# Altium PCB LiPo_4S_balancer.PcbDoc
Units mm, origin at the board's own origin, x right, y up, seen from the top; angles counter-clockwise.
Board outline 99.06 x 50.8 mm, 2 copper layers (Top Layer, Bottom Layer); 41 components, 37 nets, 115 pads, 20 vias.
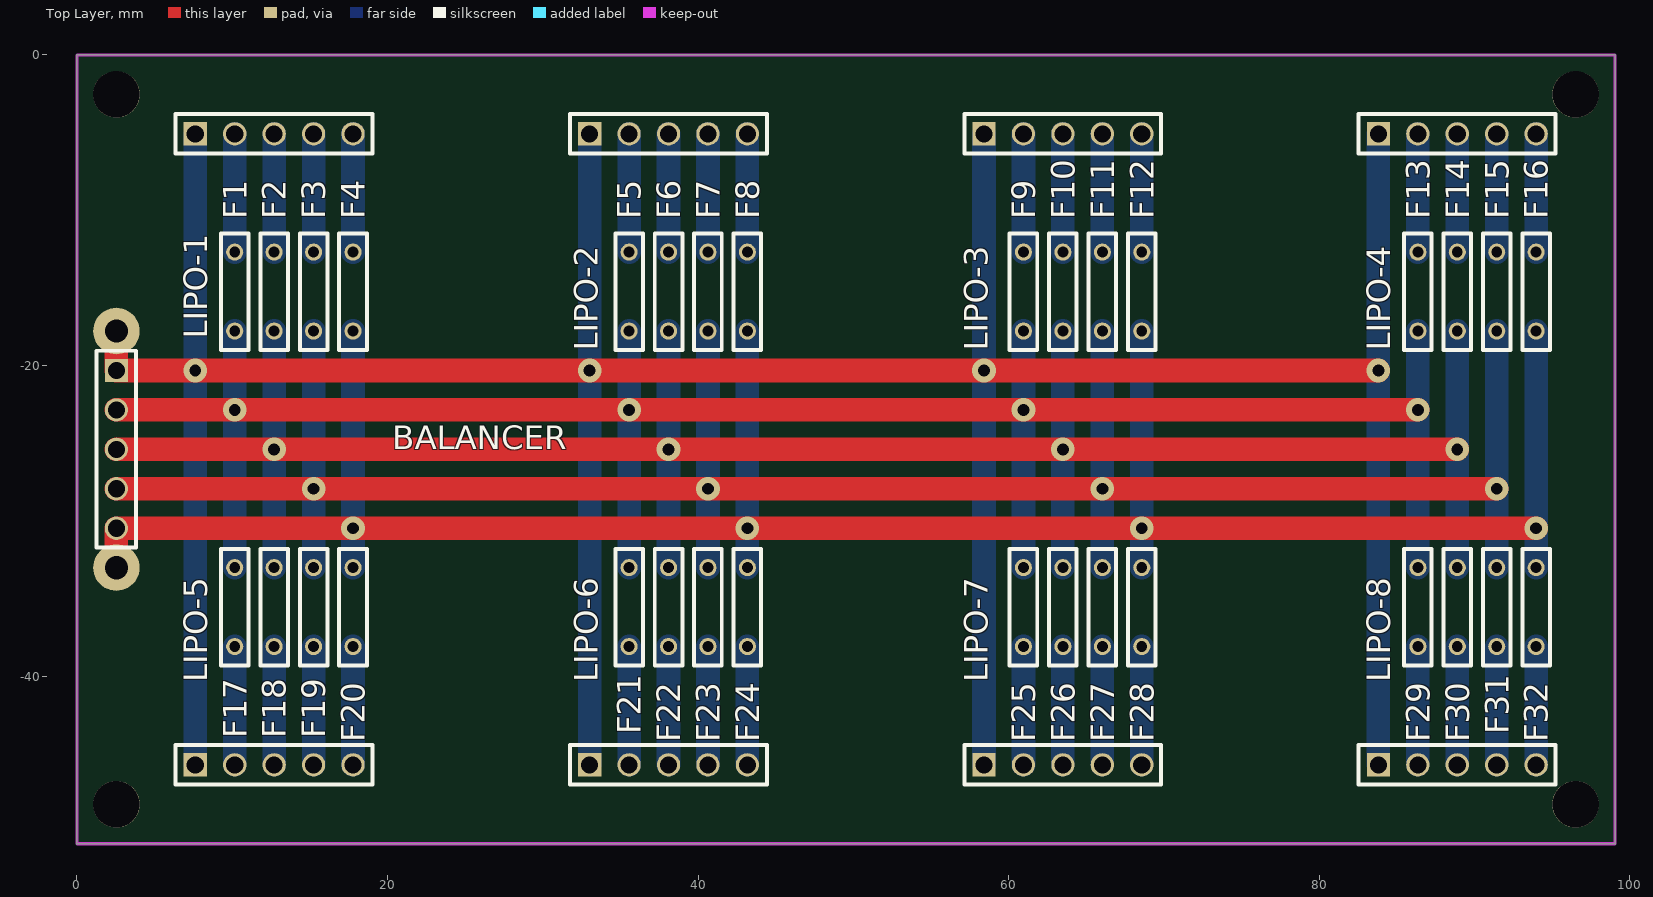
[diagram p0: Top Layer view]
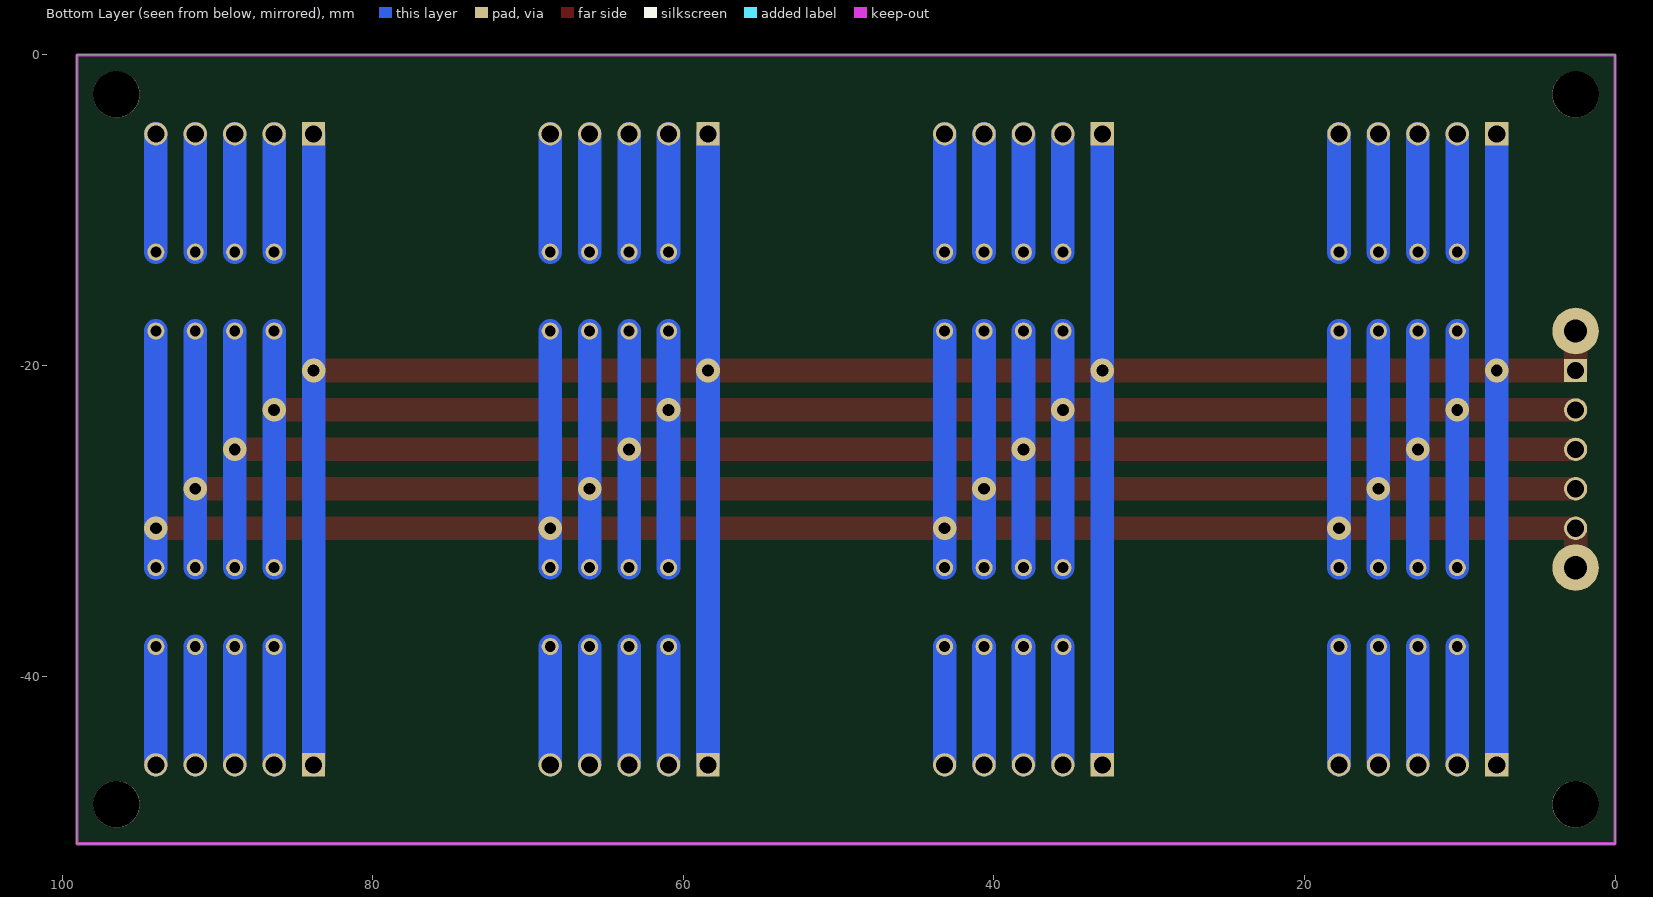
[diagram p1: Bottom Layer view, seen from below]

## Layer stack, top to bottom
Top Solder: solder mask 0.0102, Solder Resist, Dk 3.5
Top Layer: signal copper 0.0356
Dielectric 1: dielectric 0.32, FR-4, Dk 4.8
Bottom Layer: signal copper 0.0356
Bottom Solder: solder mask 0.0102, Solder Resist, Dk 3.5

## Board outline
0,-50.8 99.06,-50.8 99.06,0 0,0

## Design rules (kind name [scope] priority, off if disabled: settings)
Clearance [All] p1: gap=0.254
PolygonConnect [All] p1: connectstyle=Relief reliefconductorwidth=0.254 reliefentries=4 polygonreliefangle="90 Angle" airgapwidth=0.254
RoutingVias [All] p1: holewidth=0.711 width=1.27 viastyle="Through Hole" minholewidth=0.711 minwidth=1.27 maxholewidth=0.762 maxwidth=1.524
SolderMaskExpansion [All] p1: expansion=0.102
Width [All] p1: maxlimit=5.08 minlimit=0.254 preferedwidth=0.254
30 further rules are at their usual default settings.

## Components (designator, comment, footprint, x,y, rotation, side; value= is the part's Value field where it differs from the comment)
BALANCER "Header 1X5" HEADER_2.54MM_F_1x5 2.54,-25.4 r270 top
F1 "1.1A" "TH multifuse 5mm" 10.16,-15.24 r0 top
F2 "1.1A" "TH multifuse 5mm" 12.7,-15.24 r0 top
F3 "1.1A" "TH multifuse 5mm" 15.24,-15.24 r0 top
F4 "1.1A" "TH multifuse 5mm" 17.78,-15.24 r0 top
F5 "1.1A" "TH multifuse 5mm" 35.56,-15.24 r0 top
F6 "1.1A" "TH multifuse 5mm" 38.1,-15.24 r0 top
F7 "1.1A" "TH multifuse 5mm" 40.64,-15.24 r0 top
F8 "1.1A" "TH multifuse 5mm" 43.18,-15.24 r0 top
F9 "1.1A" "TH multifuse 5mm" 60.96,-15.24 r0 top
F10 "1.1A" "TH multifuse 5mm" 63.5,-15.24 r0 top
F11 "1.1A" "TH multifuse 5mm" 66.04,-15.24 r0 top
F12 "1.1A" "TH multifuse 5mm" 68.58,-15.24 r0 top
F13 "1.1A" "TH multifuse 5mm" 86.36,-15.24 r0 top
F14 "1.1A" "TH multifuse 5mm" 88.9,-15.24 r0 top
F15 "1.1A" "TH multifuse 5mm" 91.44,-15.24 r0 top
F16 "1.1A" "TH multifuse 5mm" 93.98,-15.24 r0 top
F17 "1.1A" "TH multifuse 5mm" 10.16,-35.56 r180 top
F18 "1.1A" "TH multifuse 5mm" 12.7,-35.56 r180 top
F19 "1.1A" "TH multifuse 5mm" 15.24,-35.56 r180 top
F20 "1.1A" "TH multifuse 5mm" 17.78,-35.56 r180 top
F21 "1.1A" "TH multifuse 5mm" 35.56,-35.56 r180 top
F22 "1.1A" "TH multifuse 5mm" 38.1,-35.56 r180 top
F23 "1.1A" "TH multifuse 5mm" 40.64,-35.56 r180 top
F24 "1.1A" "TH multifuse 5mm" 43.18,-35.56 r180 top
F25 "1.1A" "TH multifuse 5mm" 60.96,-35.56 r180 top
F26 "1.1A" "TH multifuse 5mm" 63.5,-35.56 r180 top
F27 "1.1A" "TH multifuse 5mm" 66.04,-35.56 r180 top
F28 "1.1A" "TH multifuse 5mm" 68.58,-35.56 r180 top
F29 "1.1A" "TH multifuse 5mm" 86.36,-35.56 r180 top
F30 "1.1A" "TH multifuse 5mm" 88.9,-35.56 r180 top
F31 "1.1A" "TH multifuse 5mm" 91.44,-35.56 r180 top
F32 "1.1A" "TH multifuse 5mm" 93.98,-35.56 r180 top
LIPO-1 "Header 1X5" HEADER_2.54MM_F_1x5 12.7,-5.08 r0 top
LIPO-2 "Header 1X5" HEADER_2.54MM_F_1x5 38.1,-5.08 r0 top
LIPO-3 "Header 1X5" HEADER_2.54MM_F_1x5 63.5,-5.08 r0 top
LIPO-4 "Header 1X5" HEADER_2.54MM_F_1x5 88.9,-5.08 r0 top
LIPO-5 "Header 1X5" HEADER_2.54MM_F_1x5 12.7,-45.72 r0 top
LIPO-6 "Header 1X5" HEADER_2.54MM_F_1x5 38.1,-45.72 r0 top
LIPO-7 "Header 1X5" HEADER_2.54MM_F_1x5 63.5,-45.72 r0 top
LIPO-8 "Header 1X5" HEADER_2.54MM_F_1x5 88.9,-45.72 r0 top

## Footprints (in the part's own frame and the unit in brackets; to place one, negate y for a bottom-side part, rotate by r counter-clockwise, add the part's x,y. Pads: shape width x height; smd on the part's side, far side on the other; paste and mask are expansions set on the pad)
HEADER_2.54MM_F_1x5 [mm] "2×1 tüskesor"
  rect 1.5x1.5 hole 1.1: 1(-5.08,0)
  round 1.5 hole 1.1: 2(-2.54,0) 3(0,0) 4(2.54,0) 5(5.08,0)
  silkscreen extent -6.35,-1.27 6.33,1.27, body extent -6.35,-1.27 6.35,1.23, height 8.4
"TH multifuse 5mm" [mm]
  round 1.1 hole 0.7: 1(0,-2.54) 2(0,2.54)
  silkscreen extent -0.89,-3.75 0.89,3.75

## Part data
BALANCER LIPO-1 LIPO-2 LIPO-3 LIPO-4 LIPO-5 LIPO-6 LIPO-7 LIPO-8: "Header, 5-Pin"
F1 F2 F3 F4 F5 F6 F7 F8 F9 F10 F11 F12 F13 F14 F15 F16 F17 F18 F19 F20 F21 F22 F23 F24 F25 F26 F27 F28 F29 F30 F31 F32: library part MULTIFUSE, "multifuse"

## Free pads (board coordinates)
  round 3 hole 3: 0(2.54,-2.54) 1(2.54,-48.26) 2(96.52,-2.54) 3(96.52,-48.26)
  round 3 hole 1.5: 4(2.54,-33.02) 4(2.54,-17.78)

## Via types
v1: diameter 1.524, hole 0.762, Top Layer to Bottom Layer, 20 vias

## Nets (pads, with @x,y where several pads share a name; then routed paths per layer and width w, separated by ;. In a path a pad name is that pad's centre, name@x,y a point inside that pad or via, vN(x,y) a via of type N, cw(c..) or ccw(c..) an arc to the next point about the centre after c; other vN are vias at no path point)
CELL_1: BALANCER.2 F1.1 F5.1 F9.1 F13.1 F17.1 F21.1 F25.1 F29.1 | length 144.8
  Top Layer w1.524: BALANCER.2 v1(86.36,-22.86)
  Bottom Layer w1.524: F17.1 F1.1 ; F21.1 F5.1 ; F25.1 F9.1 ; F29.1 F13.1
  other v1: 10.16,-22.86 35.56,-22.86 60.96,-22.86
CELL_2: BALANCER.3 F2.1 F6.1 F10.1 F14.1 F18.1 F22.1 F26.1 F30.1 | length 147.3
  Top Layer w1.524: BALANCER.3 v1(88.9,-25.4)
  Bottom Layer w1.524: F18.1 F2.1 ; F22.1 F6.1 ; F26.1 F10.1 ; F30.1 F14.1
  other v1: 12.7,-25.4 38.1,-25.4 63.5,-25.4
CELL_3: BALANCER.4 F3.1 F7.1 F11.1 F15.1 F19.1 F23.1 F27.1 F31.1 | length 149.9
  Top Layer w1.524: BALANCER.4 v1(91.44,-27.94)
  Bottom Layer w1.524: F19.1 F3.1 ; F23.1 F7.1 ; F27.1 F11.1 ; F31.1 F15.1
  other v1: 15.24,-27.94 40.64,-27.94 66.04,-27.94
CELL_4: BALANCER.5 F4.1 F8.1 F12.1 F16.1 F20.1 F24.1 F28.1 F32.1 pad.4@2.54,-33.02 | length 154.9
  Top Layer w1.524: pad.4@2.54,-33.02 BALANCER.5 v1(17.78,-30.48) v1(43.18,-30.48) v1(68.58,-30.48) v1(93.98,-30.48)
  Bottom Layer w1.524: F20.1 F4.1 ; F24.1 F8.1 ; F28.1 F12.1 ; F32.1 F16.1
GND: BALANCER.1 LIPO-1.1 LIPO-2.1 LIPO-3.1 LIPO-4.1 LIPO-5.1 LIPO-6.1 LIPO-7.1 LIPO-8.1 pad.4@2.54,-17.78 | length 246.4
  Top Layer w1.524: pad.4@2.54,-17.78 BALANCER.1 v1(7.62,-20.32) v1(33.02,-20.32) v1(58.42,-20.32) v1(83.82,-20.32)
  Bottom Layer w1.524: LIPO-5.1 LIPO-1.1 ; LIPO-6.1 LIPO-2.1 ; LIPO-7.1 LIPO-3.1 ; LIPO-8.1 LIPO-4.1
NetF1_2: F1.2 LIPO-1.2 | length 7.6
  Bottom Layer w1.524: F1.2 LIPO-1.2
NetF2_2: F2.2 LIPO-1.3 | length 7.6
  Bottom Layer w1.524: F2.2 LIPO-1.3
NetF3_2: F3.2 LIPO-1.4 | length 7.6
  Bottom Layer w1.524: F3.2 LIPO-1.4
NetF4_2: F4.2 LIPO-1.5 | length 7.6
  Bottom Layer w1.524: F4.2 LIPO-1.5
NetF5_2: F5.2 LIPO-2.2 | length 7.6
  Bottom Layer w1.524: F5.2 LIPO-2.2
NetF6_2: F6.2 LIPO-2.3 | length 7.6
  Bottom Layer w1.524: F6.2 LIPO-2.3
NetF7_2: F7.2 LIPO-2.4 | length 7.6
  Bottom Layer w1.524: F7.2 LIPO-2.4
NetF8_2: F8.2 LIPO-2.5 | length 7.6
  Bottom Layer w1.524: F8.2 LIPO-2.5
NetF9_2: F9.2 LIPO-3.2 | length 7.6
  Bottom Layer w1.524: F9.2 LIPO-3.2
NetF10_2: F10.2 LIPO-3.3 | length 7.6
  Bottom Layer w1.524: F10.2 LIPO-3.3
NetF11_2: F11.2 LIPO-3.4 | length 7.6
  Bottom Layer w1.524: F11.2 LIPO-3.4
NetF12_2: F12.2 LIPO-3.5 | length 7.6
  Bottom Layer w1.524: F12.2 LIPO-3.5
NetF13_2: F13.2 LIPO-4.2 | length 7.6
  Bottom Layer w1.524: F13.2 LIPO-4.2
NetF14_2: F14.2 LIPO-4.3 | length 7.6
  Bottom Layer w1.524: F14.2 LIPO-4.3
NetF15_2: F15.2 LIPO-4.4 | length 7.6
  Bottom Layer w1.524: F15.2 LIPO-4.4
NetF16_2: F16.2 LIPO-4.5 | length 7.6
  Bottom Layer w1.524: F16.2 LIPO-4.5
NetF17_2: F17.2 LIPO-5.2 | length 7.6
  Bottom Layer w1.524: LIPO-5.2 F17.2
NetF18_2: F18.2 LIPO-5.3 | length 7.6
  Bottom Layer w1.524: LIPO-5.3 F18.2
NetF19_2: F19.2 LIPO-5.4 | length 7.6
  Bottom Layer w1.524: LIPO-5.4 F19.2
NetF20_2: F20.2 LIPO-5.5 | length 7.6
  Bottom Layer w1.524: LIPO-5.5 F20.2
NetF21_2: F21.2 LIPO-6.2 | length 7.6
  Bottom Layer w1.524: LIPO-6.2 F21.2
NetF22_2: F22.2 LIPO-6.3 | length 7.6
  Bottom Layer w1.524: LIPO-6.3 F22.2
NetF23_2: F23.2 LIPO-6.4 | length 7.6
  Bottom Layer w1.524: LIPO-6.4 F23.2
NetF24_2: F24.2 LIPO-6.5 | length 7.6
  Bottom Layer w1.524: LIPO-6.5 F24.2
NetF25_2: F25.2 LIPO-7.2 | length 7.6
  Bottom Layer w1.524: LIPO-7.2 F25.2
NetF26_2: F26.2 LIPO-7.3 | length 7.6
  Bottom Layer w1.524: LIPO-7.3 F26.2
NetF27_2: F27.2 LIPO-7.4 | length 7.6
  Bottom Layer w1.524: LIPO-7.4 F27.2
NetF28_2: F28.2 LIPO-7.5 | length 7.6
  Bottom Layer w1.524: LIPO-7.5 F28.2
NetF29_2: F29.2 LIPO-8.2 | length 7.6
  Bottom Layer w1.524: LIPO-8.2 F29.2
NetF30_2: F30.2 LIPO-8.3 | length 7.6
  Bottom Layer w1.524: LIPO-8.3 F30.2
NetF31_2: F31.2 LIPO-8.4 | length 7.6
  Bottom Layer w1.524: LIPO-8.4 F31.2
NetF32_2: F32.2 LIPO-8.5 | length 7.6
  Bottom Layer w1.524: LIPO-8.5 F32.2

## Keep-outs
Keep-Out Layer:
  the board outline again, w0.2